# Altium PCB SLA3000-FPGA.PcbDoc (part 1 of 2)
Units mil, origin at the board's own origin, x right, y up, seen from the top; angles counter-clockwise.
Board outline 1712 x 964 mil, 4 copper layers (Top Layer, Ground, Power, Bottom Layer), stack 62.2 mil thick; 81 components, 60 nets, 407 pads, 100 vias.
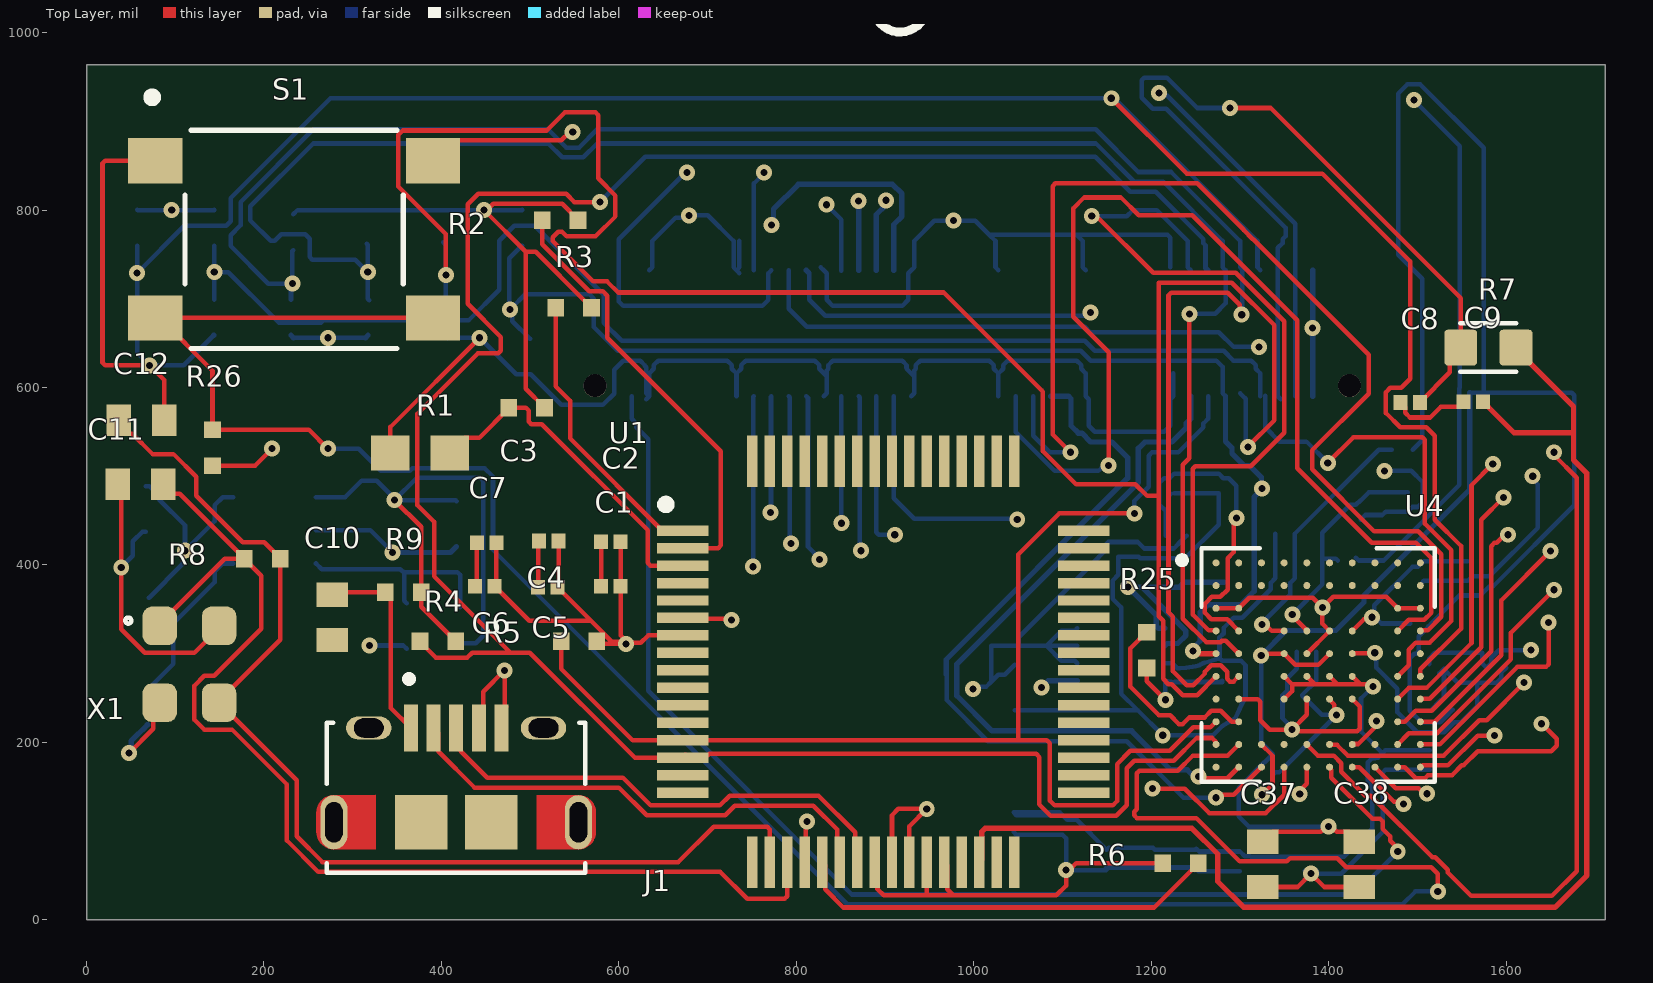
[diagram p0: Top Layer view]
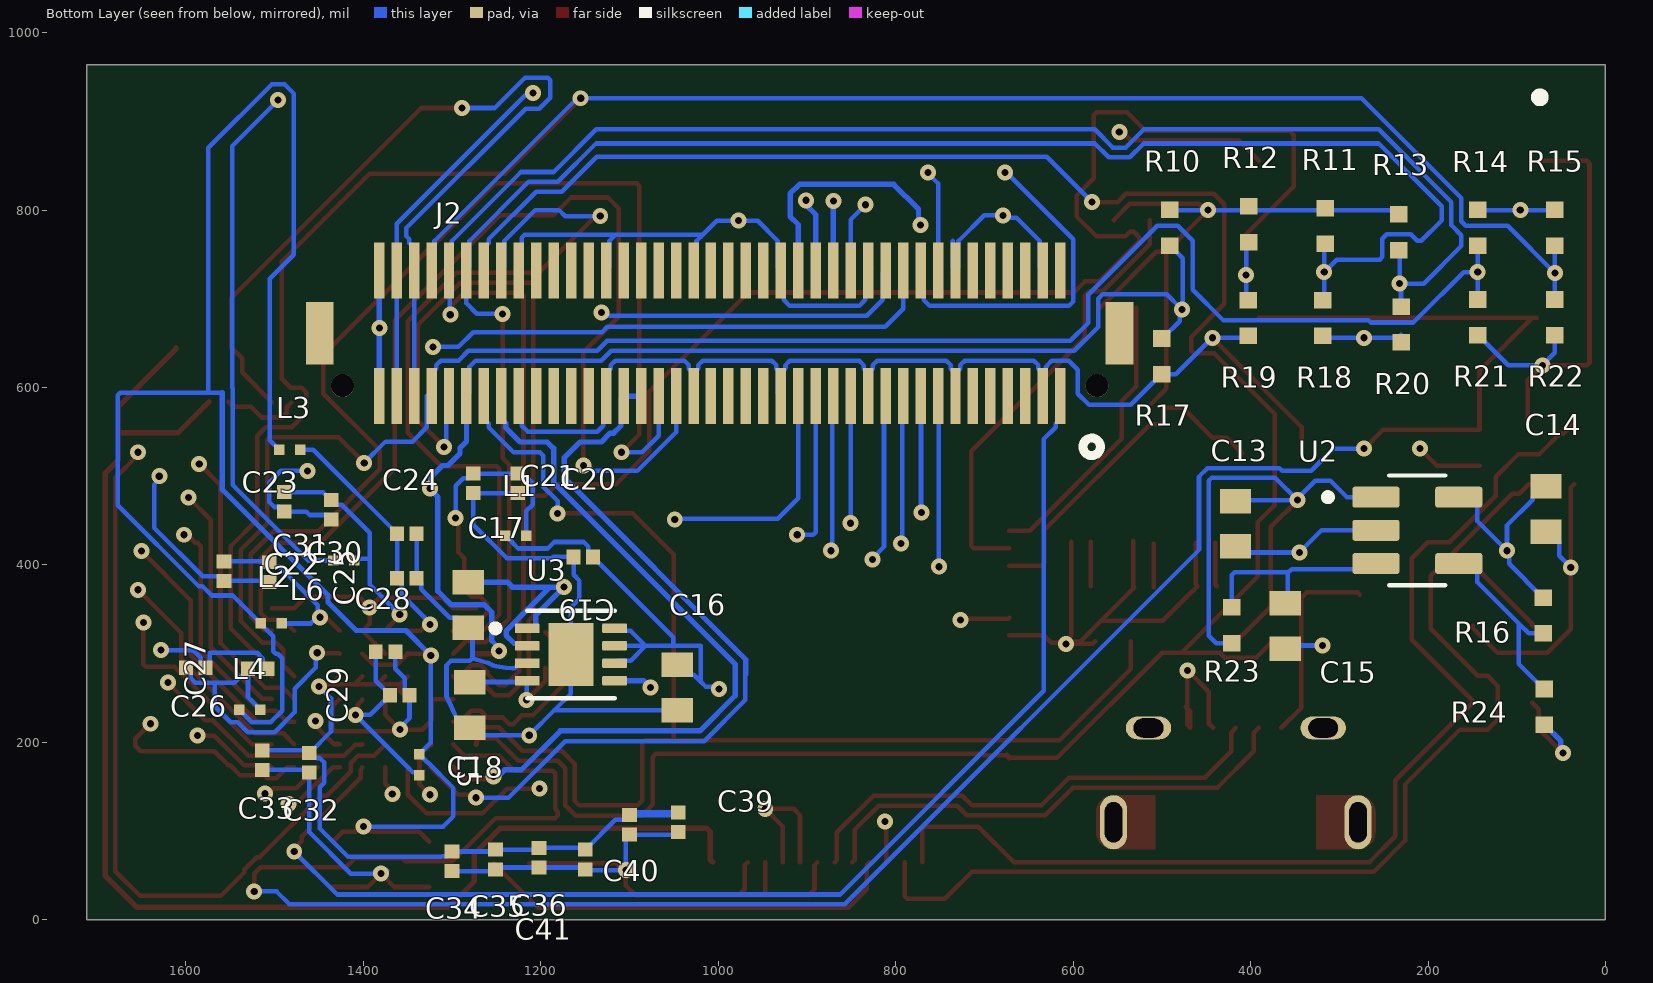
[diagram p1: Bottom Layer view, seen from below]
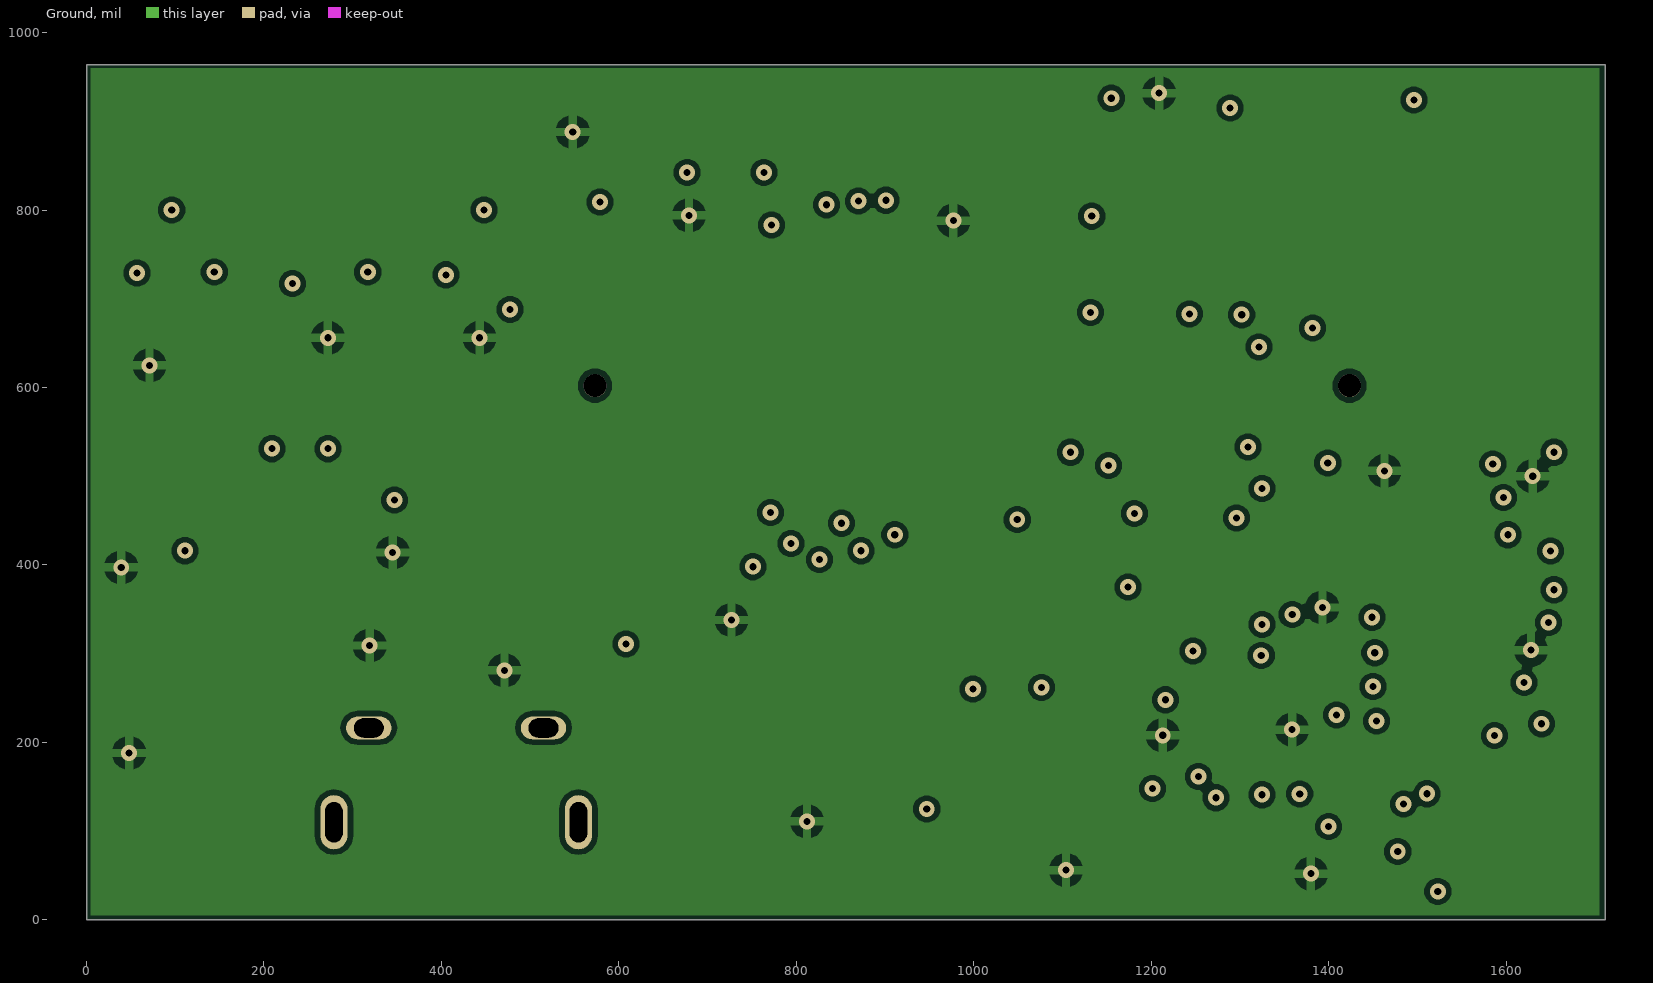
[diagram p2: Ground]
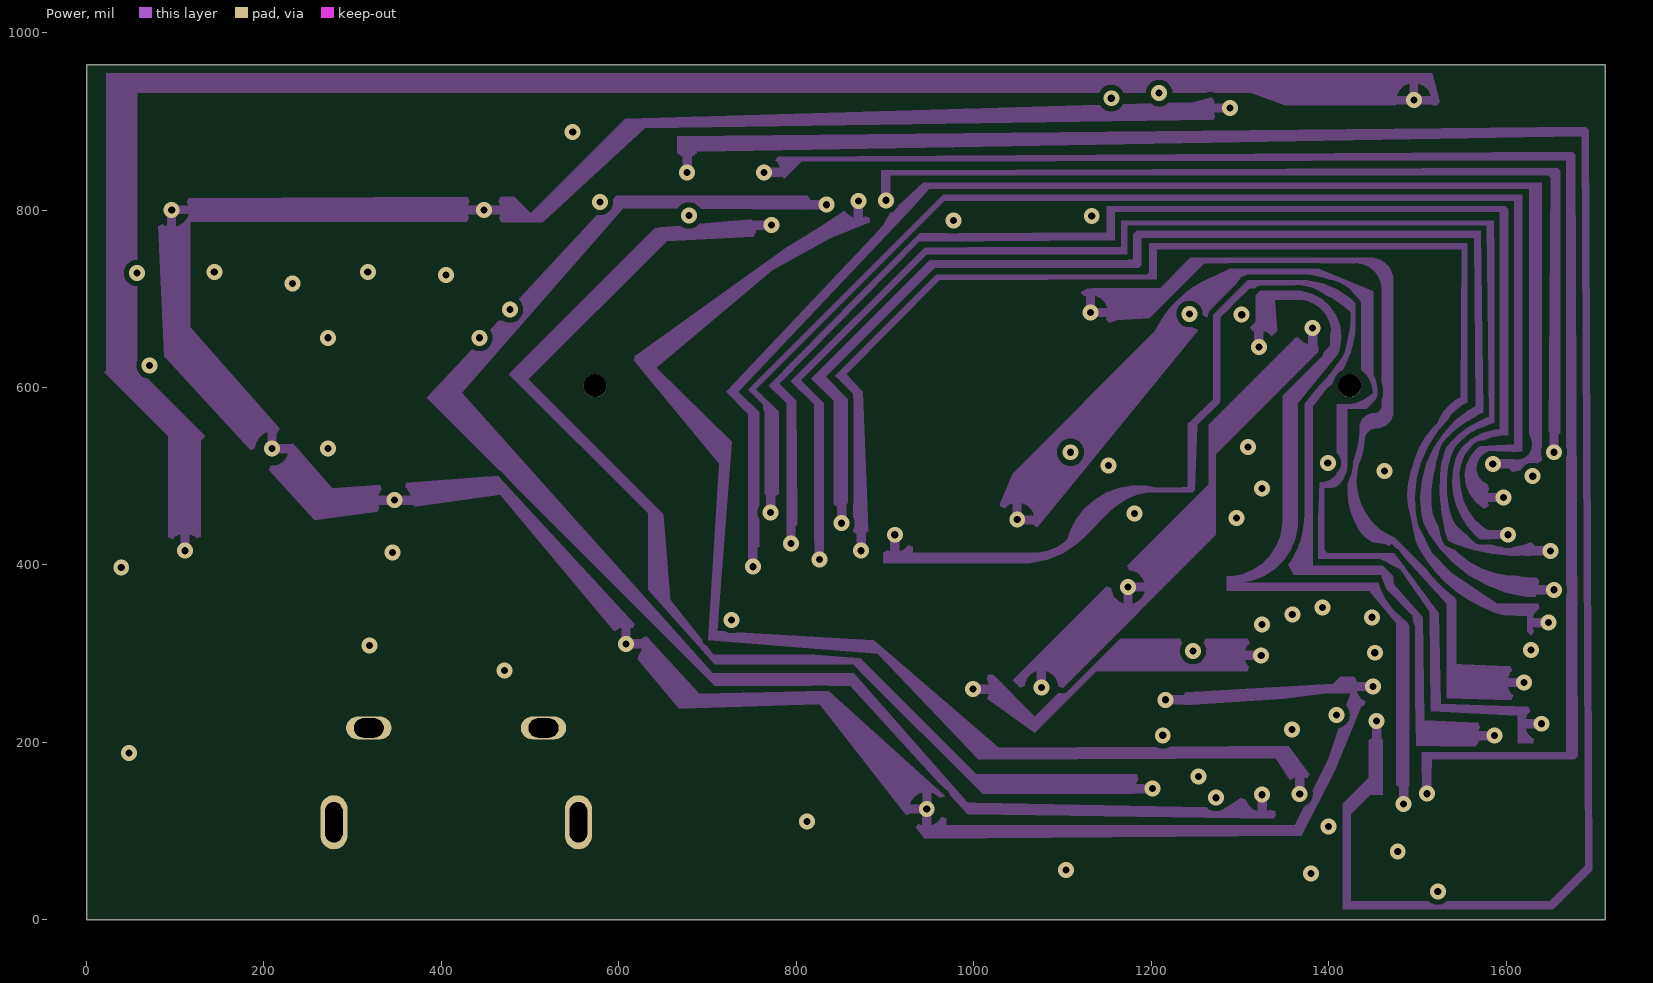
[diagram p3: Power]

## Layer stack, top to bottom
Top Solder: solder mask 0.4, Solder Resist, Dk 3.5
Top Layer: signal copper 1.7
Dielectric1: core 14, FR-4, Dk 4.2
Ground: signal copper 1.4
Dielectric3: prepreg 28, FR-4, Dk 4.2
Power: signal copper 1.4
Dielectric2: core 14, FR-4, Dk 4.2
Bottom Layer: signal copper 1.7
Bottom Solder: solder mask 0.4, Solder Resist, Dk 3.5

## Board outline
0,0 1712,0 1712,964 0,964 0,0

## Design rules (kind name [scope] priority, off if disabled: settings)
Clearance Clearance_NPTH [InPadClass('NPTH')] p1: gap=15 ignorepadtopadclearanceinfootprint=FALSE except(0: Arc-Hole Track-Hole SMDPad-Hole THPad-Hole Via-Hole Fill-Hole Poly-Hole Region-Hole Text-Hole)
Clearance PolygonClearance [(InPolygon AND OnLayer('Top Layer'))] p2: gap=7.5 ignorepadtopadclearanceinfootprint=FALSE except(0: Arc-Hole Track-Hole SMDPad-Hole THPad-Hole Via-Hole Fill-Hole Poly-Hole Region-Hole Text-Hole)
Clearance OverlayClearance [OnLayer('Top Overlay')] p3: gap=0 ignorepadtopadclearanceinfootprint=FALSE
Clearance [All] p4: gap=6 ignorepadtopadclearanceinfootprint=FALSE except(0: Arc-Hole Track-Hole SMDPad-Hole THPad-Hole Via-Hole Fill-Hole Poly-Hole Region-Hole Text-Hole)
DiffPairsRouting [All] p1: maxlimit=10 minlimit=5 mostfreqgap=10 toplayer_prefgap=7 toplayer_minwidth=10 toplayer_maxwidth=16 toplayer_prefwidth=14 midlayer1_mingap=10 midlayer1_minwidth=15 midlayer1_maxwidth=15 midlayer1_prefwidth=15 midlayer2_mingap=10 midlayer2_minwidth=15 midlayer2_maxwidth=15 midlayer2_prefwidth=15 bottomlayer_mingap=10 bottomlayer_minwidth=15 bottomlayer_maxwidth=15 bottomlayer_prefwidth=15 maxuncoupledlength=300
MinimumSolderMaskSliver [All] p1: minsoldermaskwidth=0
PolygonConnect PolygonConnect_1 [All vs IsNamedPolygon('Power_PLANE')] p1: thpad.connectstyle=Relief thpad.reliefconductorwidth=10 thpad.reliefentries=4 thpad.polygonreliefangle="90 Angle" thpad.airgapwidth=10 smdpad.connectstyle=Relief smdpad.reliefconductorwidth=10 smdpad.reliefentries=4 smdpad.polygonreliefangle="90 Angle" smdpad.airgapwidth=10 via.connectstyle=Direct via.reliefconductorwidth=10 via.reliefentries=4 via.polygonreliefangle="90 Angle" via.airgapwidth=10
PolygonConnect [All] p2: connectstyle=Relief reliefconductorwidth=10 reliefentries=4 polygonreliefangle="90 Angle" airgapwidth=10
RoomDefinition FT4222_Schematic [InComponentClass('FT4222_Schematic')] p1: confinementstyle=ConfineIn formatcopy=TRUE lockcomponents=FALSE outline -152,-31 1848,-31 1848,969 -152,969
RoomDefinition Connector_Schematic [InComponentClass('Connector_Schematic')] p2: confinementstyle=ConfineIn formatcopy=TRUE lockcomponents=FALSE outline -148,-31 1852,-31 1852,969 -148,969
RoomDefinition FPGA_Schematic [InComponentClass('FPGA_Schematic')] p3: confinementstyle=ConfineIn formatcopy=TRUE lockcomponents=FALSE outline -157,-26 1843,-26 1843,974 -157,974
RoutingCorners RoutingCorners_DiffPairs [(InNet('SDI_P') OR InNet('SDI_N'))] p1: cornerstyle=Round minsetback=100 maxsetback=100
RoutingCorners [All] p2: cornerstyle=45-Degree minsetback=100 maxsetback=100
RoutingVias VINF [InNetClass('VINF/VINR')] p1: holewidth=28 width=50 viastyle="Through Hole" minholewidth=28 minwidth=50 maxholewidth=28 maxwidth=50
RoutingVias [All] p2: holewidth=10 width=25 viastyle="Through Hole" minholewidth=10 minwidth=20 maxholewidth=10 maxwidth=25
SilkToSilkClearance [All] p1: silktosilkclearance=2
SilkToSolderMaskClearance [IsPad] p1: minsilkscreentomaskgap=4 clearancetoexposedcopper=TRUE
SolderMaskExpansion [All] p1: expansion=4 istentingtop=FALSE
Width [All] p1: maxlimit=35 minlimit=5 preferedwidth=6 minimp=50.000000 maximp=50.000000 favimp=50.000000
Width Ground [InNet('GND')] p2: maxlimit=20 minlimit=6 preferedwidth=15 minimp=50.000000 maximp=50.000000 favimp=50.000000
25 further rules are at their usual default settings.

## Classes and differential pairs
component class FT4222_Schematic: C1 C2 C3 C4 C5 C6 C7 C8 C9 C10 C11 C12 J1 R1 R2 R3 R4 R5 R6 R7 R8 R9 U1 X1
component class FPGA_Schematic: C19 C20 C21 C22 C23 C24 C25 C26 C27 C28 C29 C30 C31 C32 C33 C34 C35 C36 C37 C38 C39 C40 C41 L1 L2 L3 L4 L5 L6 mmmm R25 R26 S1 U4
component class Connector_Schematic: C13 C14 C15 C16 C17 C18 J2 R10 R11 R12 R13 R14 R15 R16 R17 R18 R19 R20 R21 R22 R23 R24 U2 U3

## Components (designator, comment, footprint, x,y, rotation, side; value= is the part's Value field where it differs from the comment)
C1 "4.7uF" CAPC0603X33N 591.02,376 r0 top
C2 "0.1uF" CAPC0603X33N 591.02,426 r0 top
C3 "0.47uF" CAPC1608X90 376,526 r0 top
C4 "4.7uF" CAPC0603X33N 521,427 r0 top
C5 "0.1uF" CAPC0603X33N 520,375 r0 top
C6 "4.7uF" CAPC0603X33N 449,376 r0 top
C7 "0.1uF" CAPC0603X33N 451,425 r0 top
C8 "4.7uF" CAPC0603X33N 1492.02,583 r0 top
C9 "0.1uF" CAPC0603X33N 1563.02,584 r0 top
C10 "0.1uF" INDC1005X45 277,341 r90 top
C11 "10pF" INDC1005X45 61,491 r0 top
C12 "10pF" INDC1005X45 62,563 r180 top
C13 "1uF" INDC1005X45 417,446.41 r90 bottom
C14 "1uF" INDC1005X45 67,463 r90 bottom
C15 "0.1uF" INDC1005X45 361,331 r90 bottom
C16 "1uF" INDC1005X45 1046,262 r90 bottom
C17 "1uF" INDC1005X45 1282,355 r90 bottom
C18 "1uF" INDC1005X45 1280,242 r90 bottom
C19 "10uF" CAPC0603X33N 1152,409 r180 bottom
C20 "0.1uF" CAPC0603X33N 1226,492 r90 bottom
C21 "0.1uF" CAPC0603X33N 1276,492 r90 bottom
C22 "0.1uF" CAPC0603X33N 1557,393 r90 bottom
C23 "0.1uF" CAPC0603X33N 1506,392 r90 bottom
C24 "0.1uF" CAPC0603X33N 1351,435 r0 bottom
C25 "0.1uF" CAPC0603X33N 1351,385 r0 bottom
C26 "0.1uF" CAPC0603X33N 1588.98,284 r0 bottom
C27 "0.1uF" CAPC0603X33N 1518.98,283 r0 bottom
C28 "0.1uF" CAPC0603X33N 1375,302 r0 bottom
C29 "0.1uF" CAPC0603X33N 1359,253 r0 bottom
C30 "1uF" CAPC0603X33N 1436,461.98 r90 bottom
C31 "0.1uF" CAPC0603X33N 1489,471 r90 bottom
C32 "0.1uF" CAPC0603X33N 1461,177 r90 bottom
C33 "0.1uF" CAPC0603X33N 1514,180 r90 bottom
C34 "0.1uF" CAPC0603X33N 1300,66 r90 bottom
C35 "0.1uF" CAPC0603X33N 1251,68 r90 bottom
C36 "0.1uF" CAPC0603X33N 1202,70 r90 bottom
C37 "0.1uF" INDC1005X45 1325.59,62.59 r90 top
C38 "0.1uF" INDC1005X45 1434.59,62.59 r90 top
C39 "0.1uF" CAPC0603X33N 1045,110 r90 bottom
C40 "0.1uF" CAPC0603X33N 1100,107 r90 bottom
C41 "0.1uF" CAPC0603X33N 1150,68 r90 bottom
J1 "10118194-0001LF" AMPHENOL_10118194-0001LF 416.63,110 r0 top
J2 "DF12NB(3.0)-80DS-0.5V(51)" DF12NB(3.0)-80DS-0.5V(51) 998.33,661.09 r0 bottom locked (schematic designator P1)
L1 "240 Ohm @ 100MHz" IND_LQP03HQ4N5J02D 1228,433 r180 bottom
L2 "240 Ohm @ 100MHz" IND_LQP03HQ4N5J02D 1504,334 r180 bottom
L3 "240 Ohm @ 100MHz" IND_LQP03HQ4N5J02D 1483,530 r180 bottom
L4 "240 Ohm @ 100MHz" IND_LQP03HQ4N5J02D 1528,237 r180 bottom
L5 "240 Ohm @ 100MHz" IND_LQP03HQ4N5J02D 1337,175 r270 bottom
L6 "240 Ohm @ 100MHz" IND_LQP03HQ4N5J02D 1422,405 r180 bottom
R1 "47k" RES_ERJU02F1241X 496,577 r0 top
R2 "10k" RES_ERJU02F1241X 533.76,788.72 r0 top
R3 "10k" RES_ERJU02F1241X 549,690 r0 top
R4 "4.7K" RES_ERJU02F1241X 396,314 r0 top
R5 "4.7K" RES_ERJU02F1241X 555,314 r0 top
R6 "12k" RES_ERJU02F1241X 1233,64 r0 top
R7 "0" RESC1608X50N 1580,645 r0 top
R8 "1M" RES_ERJU02F1241X 198,407 r0 top
R9 "0" RES_ERJU02F1241X 357,369 r0 top
R10 "DNI" RES_ERJU02F1241X 491,780 r90 bottom
R11 "DNI" RES_ERJU02F1241X 316,782 r90 bottom
R12 "DNI" RES_ERJU02F1241X 402,784 r90 bottom
R13 "DNI" RES_ERJU02F1241X 233,775 r90 bottom
R14 "DNI" RES_ERJU02F1241X 144.09,780 r90 bottom
R15 "DNI" RES_ERJU02F1241X 57.36,780 r90 bottom
R16 "215k" RES_ERJU02F1241X 70,343 r90 bottom
R17 "DNI" RES_ERJU02F1241X 500,635 r90 bottom
R18 "DNI" RES_ERJU02F1241X 318.41,678.26 r90 bottom
R19 "DNI" RES_ERJU02F1241X 402.54,678.26 r90 bottom
R20 "DNI" RES_ERJU02F1241X 230,671 r90 bottom
R21 "DNI" RES_ERJU02F1241X 143.73,679 r90 bottom
R22 "DNI" RES_ERJU02F1241X 57,679 r90 bottom
R23 "10k" RES_ERJU02F1241X 421,332 r90 bottom
R24 "40.2k" RES_ERJU02F1241X 69,240 r90 bottom
R25 "4.7K" RES_ERJU02F1241X 1195,304 r270 top
R26 "4.7K" RES_ERJU02F1241X 142,532.16 r270 top
S1 "PTS645SM43SMTR92 LFS" SWITCH_43SMTR92LFS 234,767 r0 top
U1 "FT4222H" QFP50P1200X1200X160-64N 898,291 r0 top
U2 "AP7331-WG-7" SOT95P285X140-5N 212,439 r180 bottom
U3 "MIC47100-1.2YML" SON50P250X250X75-9N 1166,299 r180 bottom
U4 "LIF-MD6000-6JMG80I" BGA80C65P10X10_650X650X100N 1388.2,287.2 r0 top
X1 "ABM8G-12.000MHZ-4Y-T3" OSCSC320X250X100N 116,288 r0 top

## Footprints (in the part's own frame and the unit in brackets; to place one, negate y for a bottom-side part, rotate by r counter-clockwise, add the part's x,y. Pads: shape width x height; smd on the part's side, far side on the other; paste and mask are expansions set on the pad)
AMPHENOL_10118194-0001LF [mm]
  rect 0.4x1.35 smd: 1(-1.3,2.7) 2(-0.65,2.7) 3(0,2.7) 4(0.65,2.7) 5(1.3,2.7)
  oval 1.3x0.65 hole 0.55 slot 0.85 at 0 deg: S1(-2.5,2.7) S2(2.5,2.7)
  oval 0.775x1.55 hole 0.5 slot 1.15 at 90 deg: S3(-3.5,0) S6(3.5,0)
  rect 1.5x1.55 smd: S4(-1,0) S5(1,0)
  Top Layer region: 193 vertices and 0 holes, not listed, extent 2.3,-0.78 4,0.775
  Top Layer region: 193 vertices and 0 holes, not listed, extent -4,-0.775 -2.3,0.78
  silkscreen extent -3.7,-1.45 3.7,4.2
BGA80C65P10X10_650X650X100N [mm]
  round 0.2 smd: A1(-2.925,2.925) A2(-2.275,2.925) A3(-1.625,2.925) A4(-0.975,2.925) A5(-0.325,2.925) A6(0.325,2.925) A7(0.975,2.925) A8(1.625,2.925) A9(2.275,2.925) A10(2.925,2.925) B1(-2.925,2.275) B2(-2.275,2.275) B3(-1.625,2.275) B4(-0.975,2.275) B5(-0.325,2.275) B6(0.325,2.275) B7(0.975,2.275) B8(1.625,2.275) B9(2.275,2.275) B10(2.925,2.275) C1(-2.925,1.625) C2(-2.275,1.625) C9(2.275,1.625) C10(2.925,1.625) D1(-2.925,0.975) D2(-2.275,0.975) D4(-0.975,0.975) D5(-0.325,0.975) D6(0.325,0.975) D7(0.975,0.975) D9(2.275,0.975) D10(2.925,0.975) E1(-2.925,0.325) E2(-2.275,0.325) E4(-0.975,0.325) E5(-0.325,0.325) E6(0.325,0.325) E7(0.975,0.325) E9(2.275,0.325) E10(2.925,0.325) F1(-2.925,-0.325) F2(-2.275,-0.325) F4(-0.975,-0.325) F5(-0.325,-0.325) F6(0.325,-0.325) F7(0.975,-0.325) F9(2.275,-0.325) F10(2.925,-0.325) G1(-2.925,-0.975) G2(-2.275,-0.975) G4(-0.975,-0.975) G5(-0.325,-0.975) G6(0.325,-0.975) G7(0.975,-0.975) G9(2.275,-0.975) G10(2.925,-0.975) H1(-2.925,-1.625) H2(-2.275,-1.625) H9(2.275,-1.625) H10(2.925,-1.625) J1(-2.925,-2.275) J2(-2.275,-2.275) J3(-1.625,-2.275) J4(-0.975,-2.275) J5(-0.325,-2.275) J6(0.325,-2.275) J7(0.975,-2.275) J8(1.625,-2.275) J9(2.275,-2.275) J10(2.925,-2.275) K1(-2.925,-2.925) K2(-2.275,-2.925) K3(-1.625,-2.925) K4(-0.975,-2.925) K5(-0.325,-2.925) K6(0.325,-2.925) K7(0.975,-2.925) K8(1.625,-2.925) K9(2.275,-2.925) K10(2.925,-2.925)
  silkscreen extent -4,-3.34 3.34,3.34
CAPC0603X33N [mm]
  rect 0.4x0.42 smd: 1(-0.28,0) 2(0.28,0)
CAPC1608X90 [mm]
  rect 1.1x1 smd: 1(-0.85,0) 2(0.85,0)
DF12NB(3.0)-80DS-0.5V(51) [mm] "Hirose 80-pin 3mm Stacking Height Male Connector"
  rect 0.3x1.6 smd: 1(-9.75,1.8) 2(-9.75,-1.8) 3(-9.25,1.8) 4(-9.25,-1.8) 5(-8.75,1.8) 6(-8.75,-1.8) 7(-8.25,1.8) 8(-8.25,-1.8) 9(-7.75,1.8) 10(-7.75,-1.8) 11(-7.25,1.8) 12(-7.25,-1.8) 13(-6.75,1.8) 14(-6.75,-1.8) 15(-6.25,1.8) 16(-6.25,-1.8) 17(-5.75,1.8) 18(-5.75,-1.8) 19(-5.25,1.8) 20(-5.25,-1.8) 21(-4.75,1.8) 22(-4.75,-1.8) 23(-4.25,1.8) 24(-4.25,-1.8) 25(-3.75,1.8) 26(-3.75,-1.8) 27(-3.25,1.8) 28(-3.25,-1.8) 29(-2.75,1.8) 30(-2.75,-1.8) 31(-2.25,1.8) 32(-2.25,-1.8) 33(-1.75,1.8) 34(-1.75,-1.8) 35(-1.25,1.8) 36(-1.25,-1.8) 37(-0.75,1.8) 38(-0.75,-1.8) 39(-0.25,1.8) 40(-0.25,-1.8) 41(0.25,1.8) 42(0.25,-1.8) 43(0.75,1.8) 44(0.75,-1.8) 45(1.25,1.8) 46(1.25,-1.8) 47(1.75,1.8) 48(1.75,-1.8) 49(2.25,1.8) 50(2.25,-1.8) 51(2.75,1.8) 52(2.75,-1.8) 53(3.25,1.8) 54(3.25,-1.8) 55(3.75,1.8) 56(3.75,-1.8) 57(4.25,1.8) 58(4.25,-1.8) 59(4.75,1.8) 60(4.75,-1.8) 61(5.25,1.8) 62(5.25,-1.8) 63(5.75,1.8) 64(5.75,-1.8) 65(6.25,1.8) 66(6.25,-1.8) 67(6.75,1.8) 68(6.75,-1.8) 69(7.25,1.8) 70(7.25,-1.8) 71(7.75,1.8) 72(7.75,-1.8) 73(8.25,1.8) 74(8.25,-1.8) 75(8.75,1.8) 76(8.75,-1.8) 77(9.25,1.8) 78(9.25,-1.8) 79(9.75,1.8) 80(9.75,-1.8)
  round 0.66 hole 0.66 unplated: H1(-10.8,1.5) H2(10.8,1.5)
  rect 0.8x1.8 smd: M1(-11.45,0) M2(11.45,0)
  silkscreen extent -10.9,3 -10.4,3.5, body extent -11.55,-2.28 11.55,2.32, height 2.2
IND_LQP03HQ4N5J02D [mm]
  rect 0.3x0.3 smd: 1(-0.3,0) 2(0.3,0)
INDC1005X45 [mm]
  rect 0.7x0.9 smd: 1(-0.65,0) 2(0.65,0)
OSCSC320X250X100N [mm]
  rrect53% 0.98x1.1 smd: 1(-0.85,1.1) 2(-0.85,-1.1) 3(0.85,-1.1) 4(0.85,1.1)
  silkscreen extent -1.84,1.16 -1.66,1.34
QFP50P1200X1200X160-64N [mil]
  rect 58.07x11.81 smd: 1(-225.91,147.64) 2(-225.91,127.95) 3(-225.91,108.27) 4(-225.91,88.58) 5(-225.91,68.9) 6(-225.91,49.21) 7(-225.91,29.53) 8(-225.91,9.84) 9(-225.91,-9.84) 10(-225.91,-29.53) 11(-225.91,-49.21) 12(-225.91,-68.9) 13(-225.91,-88.58) 14(-225.91,-108.27) 15(-225.91,-127.95) 16(-225.91,-147.64) 33(225.91,-147.64) 34(225.91,-127.95) 35(225.91,-108.27) 36(225.91,-88.58) 37(225.91,-68.9) 38(225.91,-49.21) 39(225.91,-29.53) 40(225.91,-9.84) 41(225.91,9.84) 42(225.91,29.53) 43(225.91,49.21) 44(225.91,68.9) 45(225.91,88.58) 46(225.91,108.27) 47(225.91,127.95) 48(225.91,147.64)
  rect 11.81x58.07 smd: 17(-147.64,-225.91) 18(-127.95,-225.91) 19(-108.27,-225.91) 20(-88.58,-225.91) 21(-68.9,-225.91) 22(-49.21,-225.91) 23(-29.53,-225.91) 24(-9.84,-225.91) 25(9.84,-225.91) 26(29.53,-225.91) 27(49.21,-225.91) 28(68.9,-225.91) 29(88.58,-225.91) 30(108.27,-225.91) 31(127.95,-225.91) 32(147.64,-225.91) 49(147.64,225.91) 50(127.95,225.91) 51(108.27,225.91) 52(88.58,225.91) 53(68.9,225.91) 54(49.21,225.91) 55(29.53,225.91) 56(9.84,225.91) 57(-9.84,225.91) 58(-29.53,225.91) 59(-49.21,225.91) 60(-68.9,225.91) 61(-88.58,225.91) 62(-108.27,225.91) 63(-127.95,225.91) 64(-147.64,225.91)
  silkscreen extent -250,172 -240,182
RES_ERJU02F1241X [mm]
  rect 0.475x0.5 smd: 1(-0.512,0) 2(0.512,0)
RESC1608X50N [mm]
  rrect20% 0.94x1.02 smd: 1(-0.79,0) 2(0.79,0)
  silkscreen extent -0.8,-0.69 0.8,0.69
SON50P250X250X75-9N [mm]
  rrect25% 0.71x0.28 smd: 1(-1.25,0.75) 2(-1.25,0.25) 3(-1.25,-0.25) 4(-1.25,-0.75) 5(1.25,-0.75) 6(1.25,-0.25) 7(1.25,0.25) 8(1.25,0.75)
  rect 1.3x1.8 smd paste-2: 9(0,0)
  silkscreen extent -2.26,-1.25 1.25,1.25, body extent -1.25,-1.25 1.25,1.25, height 0.75
SOT95P285X140-5N [mm]
  rrect25% 1.35x0.6 smd: 1(-1.185,0.95) 2(-1.185,0) 3(-1.185,-0.95) 4(1.185,-0.95) 5(1.185,0.95)
  silkscreen extent -2.66,-1.57 0.8,1.57, body extent -1.5,-1.4 1.5,1.4, height 1.4
SWITCH_43SMTR92LFS [mil]
  rect 61x51 smd: 1(-156.5,88.58) 2(156.5,88.58) 3(-156.5,-88.58) 4(156.5,-88.58)
  silkscreen extent -165,-123 123,165

## Part data
C1 C4 C6 C8: library part CMP-00798-A.1, "CAP CER 4.7UF 16V X5R 0402", MfgPartNo=0402YD475MAT2A, Package=0402, Capacitance=4.7uF, Component Type=Capacitor, Mfg=AVX, Type="Ceramic - X5R"
C2 C5 C7 C9 C10 C15 C20 C21 C22 C23 C24 C25 C26 C27 C28 C29 C31 C32 C33 C34 C35 C36 C37 C38 C39 C40 C41: library part CMP-00496-A.6, "CAP CER 0.1UF 25V X7R 0402", MfgPartNo=C1005X7R1E104K, Package=402, SLA Part No=SL00150, Capacitance=0.1uF, Mfg=TDK, Type="Ceramic - X7R"
C3: library part CMP-00498-A.6, "CAP CER 0.47UF 16V 10% X7R 0603", MfgPartNo=C0603C474K4RACTU, Package=603, SLA Part No=SL00008, Capacitance=0.47uF, Mfg=Kemet, Type="Ceramic - X7R"
C11 C12: library part CMP-00614-A.1, "CAP CER 10PF 50V C0G/NP0 0402", MfgPartNo=GCM1555C1H100FA16D, Package=0402, Capacitance=10pF, Mfg=Murata, Type="Ceramic - C0G"
C13 C14 C16 C17 C18 C30: library part CMP-00695-A.2, "CAP CER 1UF 25V X5R 0402", MfgPartNo=EMK105BJ105KV-F, Package=402, Capacitance=1uF, Component Type=Capacitor, Mfg="Taiyo Yuden", Type="Ceramic - X5R"
C19: library part CMP-00647-A.1, "CAP CER 10UF 6.3V X5R 0402", MfgPartNo=GRM155R60J106ME47D, Package=0402, Capacitance=10uF, Mfg=Murata, Type="Ceramic - X5R"
J1: library part CMP-00755-A.2, "10118194-0001LF CONN USB MICRO B RECPT THRU-SMT R/A", Component Type=Connector, Gender=Female, HelpURL=https://www.amphenol-icc.com/media/wysiwyg/files/drawing/10118194.pdf, Mfg=Amphenol, MfgPartNo=10118194-0001LF, Mounting=THRU-SMT
J2: library part CMP-00854-A.1, "DF12NB(3.0)-80DS-0.5V(51) HIROSE CONN HEADER 80POS 3MM SMD 0.5MM", Component Type=Connector, Gender=Male, HelpURL=https://www.hirose.com/product/download/?distributor=digikey&type=specSheet&lang=en&num=DF12NB(4.0)-20DP-0.5V(51), Mfg=Hirose, MfgPartNo=DF12NB(3.0)-80DS-0.5V(51), Mounting=SMT
L1 L2 L3 L4 L5 L6: library part CMP-00665-A.1, "BLM03BD241SN1D FERRITE BEAD 240 OHM 0201 1LN", MfgPartNo=BLM03BD241SN1D, Package=0201, Rated Current=200mA, HelpURL=https://www.digikey.com/product-detail/en/murata-electronics-north-america/BLM03BD241SN1D/490-5173-1-ND/1948349, Inductance="240 Ohm @ 100MHz", Mfg=Murata
R1: library part CMP-00852-A.2, "RES SMD 47K OHM 1% 1/10W 0402", MfgPartNo=ERJ-U02F4702X, Package=402, Component Type=Resistor, Mfg=Panasonic, Resistance=47k
R2 R3 R23: library part CMP-00396-A.9, "RES SMD 10K OHM 1% 1/10W 0402", MfgPartNo=ERJ-2RKF1002X, Package=402, SLA Part No=SL00225, Mfg=Panasonic, Resistance=10k
R4 R5 R25 R26: library part CMP-00761-A.1, "RES SMD 4K7 OHM 1% 1/16W 0402", MfgPartNo=RC0402FR-074K7P, Package=402, Component Type=Resistor, Mfg=Yageo, Resistance=4.7K
R6: library part CMP-00612-A.1, "RES SMD 12K OHM 1% 1/16W 0402", MfgPartNo=RC0402FR-0712KL, Package=0402, Mfg=Yageo, Resistance=12k
R7: library part CMP-00342-A.7, "RES SMD 0.0OHM JUMPER 1/10W 0603", MfgPartNo=ERJ-3GEY0R00V, Package=603, SLA Part No=SL00033, Mfg=Panasonic, Resistance=0
R8: library part CMP-00430-A.9, "RES SMD 1M OHM 1% 1/10W 0402", MfgPartNo=ERJ-2RKF1004X, Package=402, SLA Part No=SL00141, Mfg=Panasonic, Resistance=1M
R9: library part CMP-00341-A.9, "RES SMD 0.0OHM JUMPER 1/10W 0402", MfgPartNo=ERJ-2GE0R00X, Package=402, SLA Part No=SL00128, Mfg=Panasonic, Resistance=0
R10 R11 R12 R13 R14 R15 R17 R18 R19 R20 R21 R22: library part CMP-00432-A.10, "Do Not Populate 0402 Res", Package=402, Component Type=Resistor, Mfg=DNI, MfgPartNo=DNI, Resistance=DNI
R16: library part CMP-00638-A.1, "RES SMD 215K OHM 1% 1/16W 0402", MfgPartNo=RC0402FR-07215KL, Package=0402, Mfg=Yageo, Resistance=215k
R24: library part CMP-00410-A.9, "RES 40.2K OHM 1/10W 1% 0402 SMD", MfgPartNo=ERJ-2RKF4022X, Package=402, SLA Part No=SL00235, Mfg=Panasonic, Resistance=40.2k
S1: library part CMP-00660-2, "PTS645SM43SMTR92 LFS SWITCH TACTILE SPST-NO 0.05A 12V", Package=SMT, HelpURL=https://www.digikey.com/product-detail/en/c-k/PTS645SM43SMTR92-LFS/CKN9112CT-ND/1146934, Mfg=C&K, MfgPartNo="PTS645SM43SMTR92 LFS"
U1: library part CMP-00851-A.3, "FT4222H USB2.0 TO QUADSPI/I2C BRIDGE IC VQFN-32", Package=VQFN-32, Component Type=Interface, HelpURL=http://www.ftdichip.com/Support/Documents/DataSheets/ICs/DS_FT4222H.pdf, Mfg=FTDI, MfgPartNo=FT4222H
U2: library part CMP-00547-A.3, "Adj 0.8-5V Out, 2-6V In, 300mA, AP7331-WG-7 LDO SOT23-5", Package=SOT-25-3, SLA Part No=SL00740, HelpURL=http://www.diodes.com/_files/datasheets/AP7346.pdf, Mfg="Diodes Inc.", MfgPartNo=AP7331-WG-7
U3: library part CMP-00239-A.3, "1.2V, 1A, MIC47100-1.2TML IC REG LDO 8MLF", Package=8-MLF, SLA Part No=SL00247, HelpURL=http://www.micrel.com/_PDF/mic47100.pdf, Mfg=Micrel, MfgPartNo=MIC47100-1.2YML
U4: library part CMP-00644-A.1, "LIF-MD6000-6JMG80I LATTICE CROSSLINK - INTERFACE MIPI D-", Package=80-CTFBGA, HelpURL=https://www.digikey.com/products/en/integrated-circuits-ics/embedded-fpgas-field-programmable-gate-array/696?k=lif-md&k=&pkeyword=lif-md&pv16=5352&pv1291=10039&FV=ffe002b8&quantity=0&ColumnSort=0&page=1&pageSize=25, Mfg=Lattice, MfgPartNo=LIF-MD6000-6JMG80I
X1: library part CMP-00613-A.2, "CRYSTAL 12.0000MHZ 10PF SMD", Package=4-SMD, Mfg=Abracon, MfgPartNo=ABM8G-12.000MHZ-4Y-T3

## Via types
v1: diameter 18, hole 8, Top Layer to Bottom Layer, 100 vias

## Nets (pads, with @x,y where several pads share a name; then routed paths per layer and width w, separated by ;. In a path a pad name is that pad's centre, name@x,y a point inside that pad or via, vN(x,y) a via of type N, cw(c..) or ccw(c..) an arc to the next point about the centre after c; other vN are vias at no path point)
BUTTON: R26.1 S1.3 S1.4 U4.J2 | length 2692.5
  Top Layer w5.12: S1.3@77.5,678.42 S1.3@82.5,678.42 ; v1(272,531) 250.68,552.32 R26.1@142,552.32 142,618.92 S1.3@82.5,678.42 ; S1.4@390.5,678.42 S1.3@82.5,678.42 ; U4.J2@1298.64,197.64 1286.14,185.14 1247.04,185.14 1230.11,168.2 1186.74,168.2 1183.74,165.21 1183.74,124.7 1180.96,121.92 1180.96,117.68 1183.96,114.68 1250.74,114.68 1299.58,65.84 1352.74,65.84 1356.46,69.56 1409.61,69.56 1419.83,59.34 1515.49,59.34 1523,51.83 v1(1523,32)
  Bottom Layer w5.12: v1(272,531) 306.72,531 331.61,506.12 364.39,506.12 367.39,509.12 448.61,509.12 458.12,499.61 458.12,416.88 857.56,17.44 1483.27,17.44 1497.83,32 v1(1523,32)
CRESETB: R25.1 U4.H2 | length 220.3
  Top Layer w5.12: R25.1@1195,324.16 1194.51,324.16 1176.6,306.25 1176.6,262.57 1208.73,230.44 1221.39,230.44 1231.16,220.67 1235.4,220.67 1242.78,228.05 1260.05,228.05 1267.72,235.72 1278.22,235.72 1290.72,223.23 U4.H2@1298.64,223.23
D+: J1.3 U1.23 | length 554.4
  Top Layer w5.12: J1.3@416.63,216.3 421.94,210.98 421.94,190.02 451.78,160.19 604.58,160.19 635.88,128.9 713.9,128.9 725,140 825,140 866.41,98.59 866.41,67.15 U1.23@868.47,65.09
D-: J1.2 U1.22 | length 561.5
  Top Layer w5.12: J1.2@391.04,216.3 396.35,210.98 396.35,190.02 437.31,149.07 599.98,149.07 631.27,117.78 719.88,117.78 730.66,128.56 819.27,128.56 846.03,101.8 846.03,67.85 U1.22@848.79,65.09
GND: C3.1 C11.1 C12.1 C13.1 C14.1 C15.1 C16.1 C17.1 C18.1 C19.1 C20.1 C21.1 C22.1 C23.1 C24.1 C25.1 C26.1 C27.1 C28.1 C29.1 C30.1 C31.1 C32.1 C33.1 C34.1 C35.1 C36.1 C37.1 C38.1 C39.1 C40.1 C41.1 J1.4 J1.5 J2.3 J2.4 J2.13 J2.14 J2.23 J2.24 J2.33 J2.34 J2.43 J2.44 J2.53 J2.54 J2.63 J2.64 J2.77 J2.78 R6.1 R17.1 R18.1 R19.1 R20.1 R21.1 R22.1 R24.1 S1.1 S1.2 U1.6 U1.20 U1.24 U1.27 U1.28 U2.2 U3.3 U3.9 U4.C1 U4.C2 U4.C9 U4.C10 U4.D6 U4.E5 U4.G2 U4.G5 U4.G7 X1.2 X1.4 | length 7765.7
  Top Layer w5.12: C11.1@35.41,491 39.12,487.29 v1(39.12,397.2) 39.12,327.66 65.69,301.09 121.61,301.09 149.46,328.94 X1.4@149.46,331.31 ; v1(48,188) 75.36,215.36 75.36,237.52 X1.2@82.54,244.69 ; v1@70.8,624.8 v1(71,625) ; S1.1@77.5,855.58 21,855.58 18,852.58 18,628 21,625 v1(71,625) ; C12.1@87.59,563 87.59,608.41 v1(71,625) ; C3.1@342.54,526 342.54,555.54 v1(443,656) ; S1.2@390.5,855.58 413.44,878.52 535.04,878.52 544.51,888 v1(548,888) ; J1.4@442.22,216.3 447,221.08 447,256.99 v1(471.14,281.13) J1.5@471.14,238.33 ; J1.5@473.13,240.32 J1.5@471.14,238.33 ; U1.6@672.09,340.21 673.19,339.11 725.89,339.11 v1(727,338) ; v1(812,111) 810.71,109.71 810.71,66.38 U1.20@809.42,65.09 U1.20@812.77,61.74 ; U1.24@888.16,65.09 891.51,61.74 891.51,34.38 898.39,27.5 946.71,27.5 947.21,28 ; U1.27@947.21,65.09 947.21,28 ; U1.28@966.9,65.09 970.25,61.74 970.25,34.38 977.13,27.5 ; R6.1@1212.84,64 1115.49,64 1107.49,56 v1(1104,56) 1104,38.49 1093.01,27.5 977.13,27.5 ; U4.C1@1273.05,351.18 U4.C2@1298.64,351.18 1310.46,363 1382,363 v1(1393,352) ; U4.G2@1298.64,248.82 1320,248.82 1323,245.82 1323,225 1333.73,214.27 1358.74,214.27 v1(1358.78,214.32) ; C37.1@1325.59,37 1365,37 v1(1380,52) 1395,37 C38.1@1434.59,37 ; v1@1359.55,211 v1@1360.81,212.26 ; v1@1359.55,213.55 1360.66,212.44 1432,212.44 1435,215.44 1435,240.41 U4.G7@1426.59,248.82 ; v1@1359.55,215.09 1375.41,230.94 U4.G5@1375.41,248.82 ; U4.E5@1375.41,300 U4.D6@1401,325.59 1393,333.59 v1(1393,352) ; U4.C10@1503.36,351.18 U4.C9@1477.77,351.18 1464.95,364 1405,364 v1(1393,352) ; J1.5@471.14,238.33 467.81,235 J1.5@467.81,216.3 471.14,219.63 J1.5@471.14,238.33 ; 947.21,28 947.71,27.5 977.13,27.5
  Bottom Layer w5.12: v1(39.12,397.2) 52.28,410.36 52.28,426.63 63.06,437.41 C14.1@67,437.41 ; R22.1@57,658.84 57,639 v1(71,625) 109.39,625 R21.1@143.24,658.84 ; R20.1@233.3,656 v1(272,656) R18.1@314.34,656 ; U2.2@258.65,439 320,439 v1(345,414) ; v1(319.12,309.2) 357.21,309.2 C15.1@361,305.41 ; R19.1@406.75,656 v1(443,656) 484.16,614.84 R17.1@500,614.84 500.49,614.84 534.86,580.47 582.06,580.47 594.69,593.1 594.69,619.95 605.02,630.28 623.92,630.28 628.94,625.26 628.94,624.48 630.81,622.61 630.81,593.57 J2.3@634.16,590.22 ; J2.3@630.81,586.87 J2.3@634.16,590.22 ; J2.4@634.16,731.95 637.5,735.3 637.5,765.12 663.92,791.54 676.54,791.54 v1(679,794) 700.36,794 729.24,765.12 729.24,735.3 J2.14@732.58,731.95 ; J2.13@732.58,590.22 J2.13@732.58,615.81 ; J2.14@735.93,728.61 J2.14@732.58,731.95 ; 735.93,765.12 735.93,735.3 J2.14@732.58,731.95 ; v1@812,107.51 v1(812,111) ; J2.24@827.66,735.3 J2.24@831.01,731.95 834.35,728.61 834.35,698.79 841.24,691.9 919.2,691.9 926.09,698.79 926.09,728.61 J2.34@929.43,731.95 932.78,735.3 932.78,765.12 955.66,788 v1(977,788) 1001.63,788 1017.63,772 ; J2.23@831.01,590.22 834.35,593.57 J2.23@834.35,612.47 ; J2.33@929.43,590.22 932.78,593.57 J2.33@932.78,612.47 ; J2.43@1027.86,590.22 J2.43@1027.86,615.81 ; J2.44@1027.86,731.95 1024.51,735.3 1024.51,765.12 1017.63,772 ; C39.1@1045,98.98 1048,95.98 C40.1@1100,95.98 1104,91.98 v1(1104,56) 1149.02,56 C41.1@1150,56.98 ; C16.1@1046,236.41 1184.59,236.41 ; 1116.05,772.01 1038.09,772.01 1017.63,772 ; J2.54@1126.28,731.95 1122.94,735.3 1122.94,765.12 1116.06,772 1136.51,772 1218.36,772.01 1221.36,769.01 J2.64@1221.36,735.3 ; C41.1@1149,57.98 C41.1@1150,56.98 ; C19.1@1163.02,409.39 C19.1@1163.02,409 ; v1(1209,931.77) 1211.46,929.3 1217.7,929.3 1362.5,784.5 J2.77@1362.5,590.22 ; U3.3@1215.21,289.16 1223.68,289.16 1229.29,283.54 1229.94,283.54 1231.93,283.54 1239.41,283.87 1250.31,285.87 ccw(c1247.14,303.14) 1254.52,287.21 1258.66,289.13 cw(c1262.28,281.37) 1259.73,289.54 1276.95,294.93 ; C20.1@1220.61,478.98 1221,478.98 C20.1@1222,479.98 ; J2.63@1224.71,615.81 J2.63@1224.71,590.22 1221.36,586.87 1221.36,557.05 1214.47,550.17 1136.52,550.17 1129.63,557.05 1129.63,586.87 J2.53@1126.28,590.22 1126.28,615.81 1121.06,621.03 1121.06,622.16 1121.06,625.26 1116.05,630.28 1038.09,630.28 1033.08,625.26 1033.08,621.03 J2.43@1027.86,615.81 ; C20.1@1226,480.98 C21.1@1276,480.98 1276,445.27 1238.14,407.42 1187.66,407.42 1186.08,409 C19.1@1163.02,409 ; C35.1@1249.02,56 C35.1@1250.5,57.48 ; C35.1@1251,57.98 C35.1@1250.5,57.48 ; C34.1@1300,54.98 1253,54.98 C35.1@1251,56.98 C35.1@1250.5,57.48 ; C24.1@1339.98,435 C25.1@1339.98,385 1334.66,379.69 1334.66,372.68 1302.61,340.63 1293.22,340.63 C17.1@1282,329.41 1282,322.35 1281.11,322.35 1276.95,318.19 1276.95,294.93 ; v1(1358.78,214.32) 1358.78,216.29 1347.98,227.1 C29.1@1347.98,253 1353.29,258.32 1353.29,272.16 1363.98,282.84 C28.1@1363.98,302 ; v1@1373.26,55.25 1376.51,52 v1(1380,52) v1@1383.49,52 ; v1@1386.74,55.25 v1@1383.49,52 ; C30.1@1436,450.95 1441.32,456.27 1460.65,456.27 1464.35,459.98 C31.1@1489,459.98 1494.32,465.29 1500.51,465.29 1505.83,470.6 1505.83,493.44 1493.27,506 v1(1463,506) ; C23.1@1506,380.98 1507,381.98 C22.1@1557,381.98 1562.32,387.29 1581.12,387.29 1635.88,442.05 1635.88,490.63 1630,496.51 v1(1630,500) ; C27.1@1513.27,288.32 1513.27,294.51 1519.58,300.83 1572.87,300.83 1572.87,289.09 C26.1@1577.95,284 1583.27,289.32 1583.27,295.51 1591.75,304 v1(1628,304) ; C33.1@1514,168.98 1464,168.98 C32.1@1461,165.98 1461,99 1414,52 v1@1383.49,52 ; J2.3@634.16,590.22 634.16,615.81 639.38,621.03 639.38,625.26 644.39,630.28 722.35,630.28 727.36,625.26 727.36,622.16 727.36,621.03 J2.13@732.58,615.81 ; J2.13@732.58,615.81 737.8,621.03 737.8,625.26 742.82,630.28 820.77,630.28 825.79,625.26 825.79,622.16 825.79,621.03 J2.23@834.35,612.47 ; J2.23@834.35,612.47 834.35,619.16 836.23,621.03 836.23,625.26 841.24,630.28 919.2,630.28 924.21,625.26 924.21,622.16 924.21,621.03 J2.33@932.78,612.47 ; J2.33@932.78,612.47 932.78,619.16 934.65,621.03 934.65,625.26 939.67,630.28 1017.62,630.28 1022.64,625.26 1022.64,622.16 1022.64,621.03 J2.43@1027.86,615.81 ; C41.1@1150,56.98 1152,58.98 C36.1@1202,58.98 1249,58.98 C35.1@1250.5,57.48 ; C19.1@1163.02,409 1163.02,388.86 1156.44,382.27 1156.44,361.85 1166,352.29 U3.9@1166,299 1166,255 1184.59,236.41 ; 1184.59,236.41 v1(1213,208) 1269.59,208 1280,218.41 1295.16,227.63 1305.5,250.25 ccw(c1297.72,253.81) 1305.74,250.82 1306.28,252.27 1306.28,286.92 1301.26,291.93 1279.95,291.93 1276.95,294.93
  Bottom Layer w6: v1(48,188) 50.3,190.3 50.3,201.63 68.51,219.84 R24.1@69,219.84 R24.1@64,214.84 ; R21.1@143.24,658.84 R21.1@143.73,658.84 ; R20.1@230.45,658.84 R20.1@233.3,656 ; R18.1@314.34,656 R18.1@317.18,658.84 ; v1(345,414) 410.18,414 C13.1@417,420.82 ; R19.1@403.91,658.84 R19.1@406.75,656 ; v1@547.81,888.19 v1(548,888) v1@548.19,888.19
ID0: J2.69 R10.1 R17.2 U4.E1 | length 1405.9
  Top Layer w6: v1(1247.14,303.14) 1250.39,303.14 1253.53,300 U4.E1@1273.05,300
  Bottom Layer w5.12: v1@479.91,685.54 479.91,674.76 499.51,655.16 R17.2@500,655.16 ; v1@480,688.62 v1@481.42,690.03 ; R10.1@491,759.84 490.51,759.84 476.46,745.8 476.46,688.98 v1(477.44,688) 479.03,689.59 494.52,705.08 566.84,705.08 571.85,700.07 571.85,668.15 598.61,641.39 1120.65,641.39 1131.77,630.28 1273.53,630.28 1280.42,623.39 1280.42,593.57 J2.69@1283.76,590.22
  Bottom Layer w6: v1(1247.14,303.14) 1247.14,306.39 1255.28,314.53 1255.28,346.92 1263.37,355 1300.63,355 1316,370.37 1316,476.49 1325,485.49 v1(1325,486) 1324.27,486.73 1324.27,498.73 1310.86,512.14 1304.41,512.14 1291,525.54 1291,532 1283.76,539.24 J2.69@1283.76,590.22
ID1: J2.70 R11.1 R18.2 U4.E2 | length 1983.3
  Top Layer w5.12: v1(1243,683) 1243,520.25 1235.64,512.89 1235.64,363 1235.64,339.47 1262.02,313.09 1278.22,313.09 1279.76,314.63 1284,314.63 U4.E2@1298.64,300
  Bottom Layer w5.12: R11.1@316,761.84 317,760.84 v1(317,730) ; R18.2@318.41,698.42 317,699.83 v1(317,730) ; v1(1243,683) 1272,683 1283.76,694.76 J2.70@1283.76,731.95 1280.42,735.3 1280.42,765.12 1213.77,831.76 1180.98,831.76 1137.74,875 575.56,875 559.88,859.32 536.12,859.32 520.44,875 255.45,875 184.73,804.28 184.73,788.27 207.81,765.19 212.05,765.19 219.61,772.75 246.39,772.75 251.4,767.74 251.4,747.11 254.4,744.11 302.89,744.11 v1(317,730)
ID2: J2.71 R12.1 R19.2 U4.F1 | length 2425.2
  Top Layer w5.12: v1(405,727) 405,772.97 351.44,826.54 351.44,884.63 356.45,889.64 518.64,889.64 539,910 573.68,910 576.68,907 576.68,835.69 596.15,816.21 596.15,792.79 573.68,770.32 541.03,770.32 535.88,775.47 531.64,775.47 525.51,769.33 525.51,765.09 571.08,719.52 586.66,719.52 599.12,707.06 966.08,707.06 1076.38,596.76 1077.88,595.26 1077.88,528.34 1115.28,490.94 1182.2,490.94 1195.31,477.84 1208.39,477.84 ; U4.F1@1273.05,274.41 1251.91,253.28 1235.55,253.28 1223.27,265.56 1219.4,265.56 1213.4,271.56 1213.4,337.05 1208.39,342.07 1208.39,477.84 ; v1(1309,533) 1338.88,562.88 1338.88,669.95 1290.83,718 1208.39,718 1208.39,477.84
  Bottom Layer w5.12: R12.1@402,763.84 405,760.84 v1(405,727) 405,700.88 R19.2@402.54,698.42 ; J2.71@1300.1,593.57 J2.71@1303.45,590.22 1306.54,587.13 1306.54,535.46 v1(1309,533)
ID3: J2.72 R13.1 R20.2 U4.F2 | length 2142.7
  Top Layer w5.12: U4.F2@1298.64,274.41 1292.78,268.55 1288.54,268.55 1285.54,271.55 1285.54,279.59 1278.22,286.9 1267.87,286.9 1260.55,279.59 1260.55,277.64 1247.31,264.4 1240.16,264.4 1224.52,280.04 1224.52,341.66 1219.51,346.67 1219.51,703.88 1222.5,706.88 1286.23,706.88 1299.88,693.23 1299.88,684.12 v1(1302,682)
  Bottom Layer w5.12: R20.2@230.45,699.16 230.45,715.45 v1(232,717) ; R13.1@233,754.84 232,753.84 v1(232,717) ; v1@1302.72,682.72 J2.72@1302.72,731.23 ; J2.72@1303.45,731.95 1300.1,735.3 1300.1,765.12 1222.34,842.88 1185.58,842.88 1137.46,891 575.83,891 555.27,870.44 540.73,870.44 520.17,891 255.72,891 173.61,808.89 173.61,782.66 162.49,771.54 162.49,759.51 205,717 v1(232,717)
  Bottom Layer w6: v1(1302,682) v1@1302.72,682.72
ID4: J2.73 R14.1 R21.2 U4.F9 | length 2015.2
  Top Layer w5.12: v1(1399,515) 1427.94,543.94 1505.54,543.94 1508.54,540.94 1508.54,446.3 1538.09,416.75 1538.09,336.79 1513.8,312.5 1498.19,312.5 1490.27,304.58 1490.27,286.91 U4.F9@1477.77,274.41
  Bottom Layer w5.12: R21.2@143.73,699.16 144,699.43 v1(144,730) ; R14.1@144.09,759.84 144,759.75 v1(144,730) ; J2.73@1323.13,590.22 1323.13,615.81 1317.91,621.03 1317.91,625.26 1312.9,630.28 1292.72,630.28 1281.61,641.39 1136.38,641.39 1125.26,652.51 603.21,652.51 582.97,672.75 582.97,704.67 505.39,782.25 482.11,782.25 465.35,765.49 465.35,710.35 431.01,676.01 267.18,676.01 264.42,673.25 216.61,673.25 211.6,678.26 159.86,730 v1(144,730) ; J2.73@1328.35,590.81 1328.35,555.18 1344.49,539.05 1374.95,539.05 v1(1399,515)
ID5: J2.74 R15.1 R22.2 U4.F10 | length 2492.4
  Top Layer w5.12: v1(1155,926) 1239.88,841.12 1392.88,841.12 1491.93,742.07 1491.93,609.93 1481.83,599.83 1469.58,599.83 1464.57,594.81 1464.57,571.19 1480.7,555.06 1510.15,555.06 1519.66,545.54 1519.66,450.91 1549.21,421.35 1549.21,328.18 1503.36,282.33 U4.F10@1503.36,274.41
  Bottom Layer w5.12: R22.2@57,699.16 v1(57,729) ; R15.1@57.36,759.84 57,759.48 v1(57,729) ; J2.74@1323.13,731.95 1319.79,735.3 1319.79,765.12 1161.37,923.54 1157.46,923.54 v1(1155,926) 275,926 162.49,813.49 162.49,787.26 157.48,782.25 110.25,782.25 v1(57,729)
NetC1_1: C1.1 C2.1 | length 50
  Top Layer w5.12: C1.1@580,376 C2.1@580,426
NetC3_2: C3.2 R1.1 U1.3 | length 386.6
  Top Layer w5.12: C3.2@409.46,526 426.59,543.13 442.46,543.13 475.84,576.51 R1.1@475.84,577 495.25,577 498.25,574 498.25,561.6 501.25,558.6 513.28,558.6 632.57,439.3 632.57,402.27 635.57,399.27 U1.3@672.09,399.27
NetC4_1: C4.1 C5.1 | length 49
  Top Layer w5.12: C5.1@508.98,375 C4.1@508.98,424
NetC6_1: C6.1 C7.1 | length 49.8
  Top Layer w5.12: C6.1@437.98,376 439.98,378 C7.1@439.98,425
NetC8_1: C8.1 C9.1 | length 89.2
  Top Layer w5.12: C8.1@1481,583 1486.32,577.69 1486.32,571.49 1491.63,566.17 1514.47,566.17 1526.58,578.29 1546.68,578.29 1552,583.61 C9.1@1552,584
NetC10_1: C10.1
NetC10_2: C10.2 J1.1 R9.1 | length 225.4
  Top Layer w5.12: C10.2@277,366.59 279.41,369 R9.1@336.84,369 343,362.84 343,238.75 J1.1@365.45,216.3
NetC11_2: C11.2 R8.1 U1.19 X1.1 | length 1309.9
  Top Layer w5.12: X1.1@82.54,331.31 82.54,333.67 155.87,407 R8.1@177.84,407 ; C11.2@86.59,491 97.31,480.29 105.05,480.29 177.84,407.49 R8.1@177.84,407 ; U1.19@789.73,65.09 789.73,26.77 786.73,23.77 744.64,23.77 714.43,53.97 261.3,53.97 225.88,89.39 225.88,152.55 163.95,214.48 132.62,214.48 121.61,225.48 121.61,263.9 132.62,274.91 143.91,274.91 197,328 197,387.84 R8.1@177.84,407
NetC12_2: C12.2 R8.2 U1.18 X1.3 | length 1238.8
  Top Layer w5.12: C12.2@36.41,563 36.41,559.06 47.63,547.84 51.57,547.84 74.41,525 98,525 123.6,499.4 123.6,477.8 176,425.4 200.25,425.4 218.16,407.49 R8.2@218.16,407 218.16,315.75 149.46,247.06 X1.3@149.46,244.69 237,157.16 237,94 265.91,65.09 667.09,65.09 706.8,104.8 767.05,104.8 770.05,101.81 U1.18@770.05,65.09
NetC15_2: C15.2 R23.2 U2.3 | length 240.9
  Bottom Layer w5.12: U2.3@258.65,401.6 264.95,395.3 353.7,395.3 358,391 ; C15.2@361,356.59 358,359.59 358,391 ; R23.2@421,352.16 421,389 418,392 359,392 358,391